# Altium PCB fat-ascii.PcbDoc
Units mm, origin at the board's own origin, x right, y up, seen from the top; angles counter-clockwise.
Board outline 48 x 48 mm, 2 copper layers (Top Layer, Bottom Layer); 16 components, 14 nets, 71 pads, 3 vias.
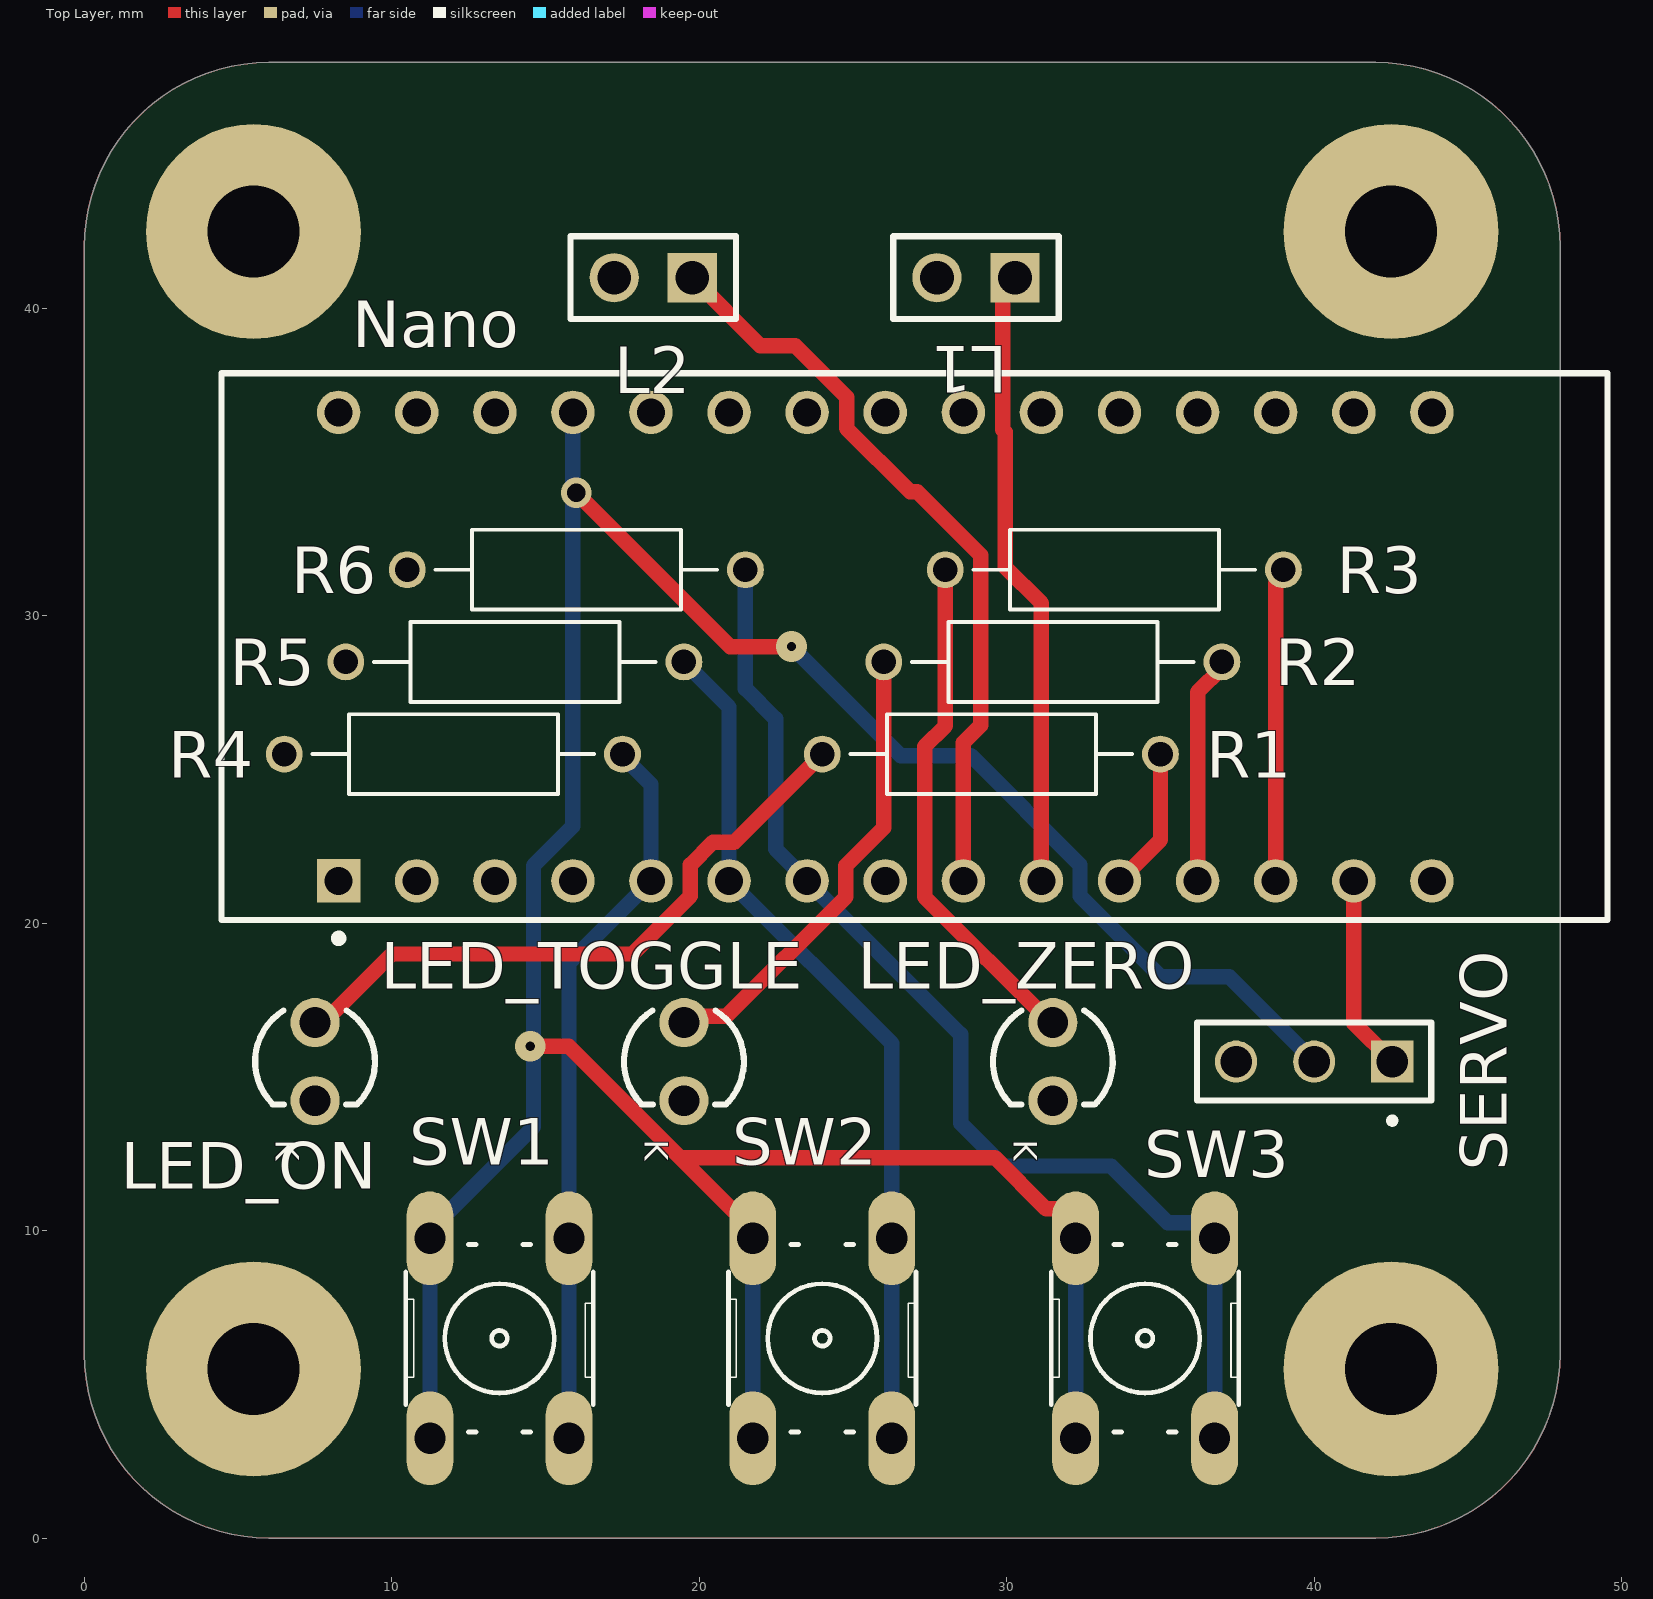
[diagram p0: Top Layer view]
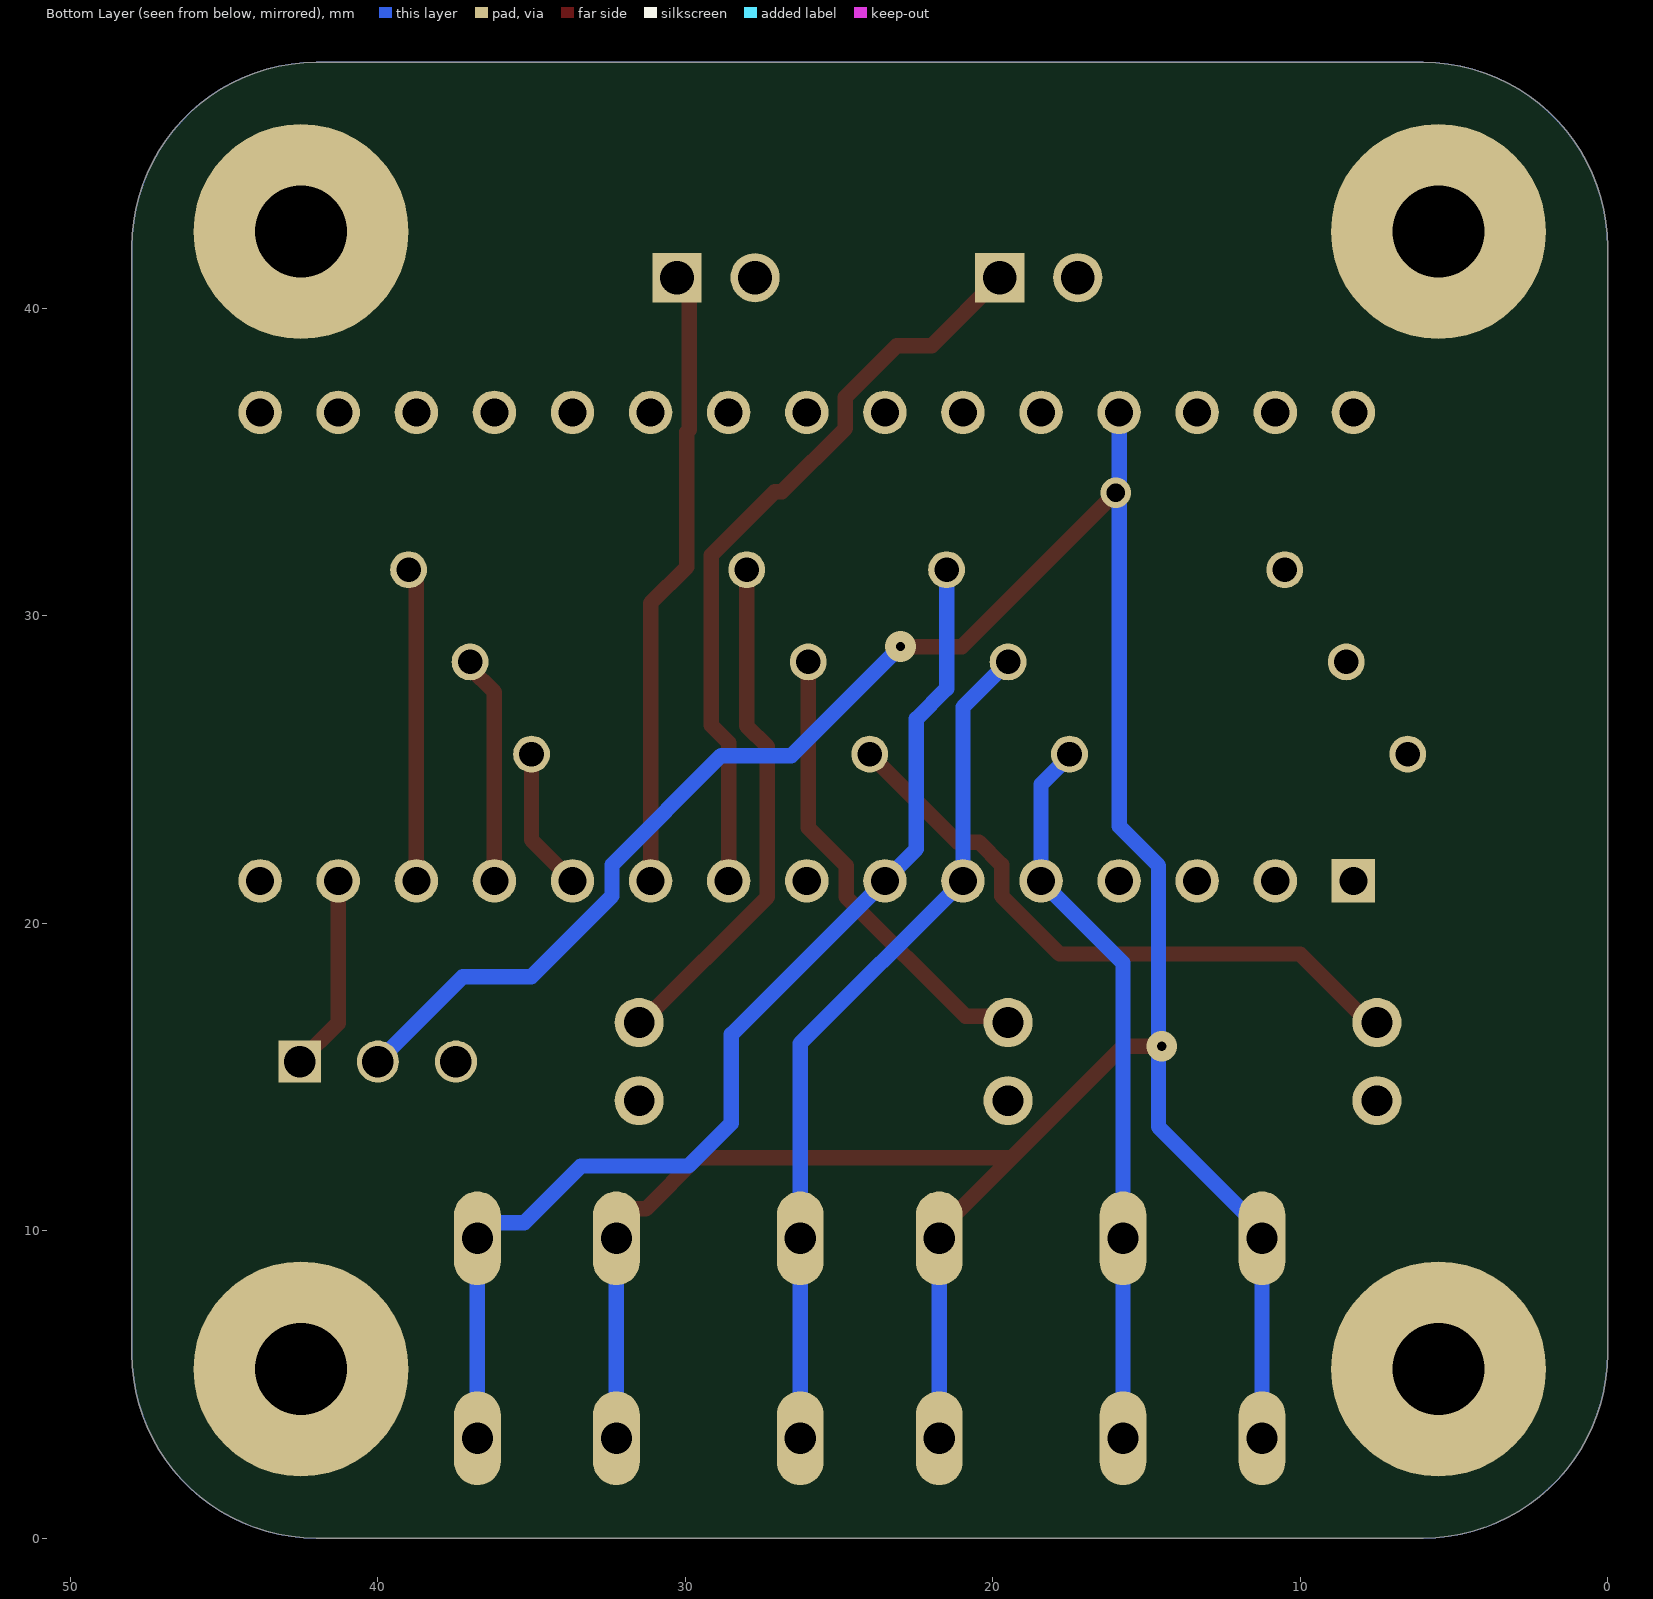
[diagram p1: Bottom Layer view, seen from below]

## Layer stack, top to bottom
Top Solder: solder mask 0.0102, Solder Resist, Dk 3.5
Top Layer: signal copper 0.0356
Dielectric 1: dielectric 0.32, FR-4, Dk 4.8
Bottom Layer: signal copper 0.0356
Bottom Solder: solder mask 0.0102, Solder Resist, Dk 3.5

## Board outline
0,6 0,42 cw(c6,42) 6,48 42,48 cw(c42,42) 48,42 48,6 cw(c42,6) 42,0 6,0 cw(c6,6)

## Design rules (kind name [scope] priority, off if disabled: settings)
AssemblyTestPointUsage [All] p0: scope1count=1 scope1_0_kind=Board scope1_0_value=Board scope2count=1 scope2_0_kind=Board scope2_0_value=Board commentlength=0
AssemblyTestpoint [All] p0: scope1count=1 scope1_0_kind=Board scope1_0_value=Board scope2count=1 scope2_0_kind=Board scope2_0_value=Board commentlength=0
BoardOutlineClearance [All] p0: scope1count=1 scope1_0_kind=Board scope1_0_value=Board scope2count=1 scope2_0_kind=Board scope2_0_value=Board commentlength=0 gap=1.5
BoardOutlineClearance [All] p1: gap=1.5 ignorepadtopadclearanceinfootprint=FALSE
Clearance [All] p0: scope1count=1 scope1_0_kind=Board scope1_0_value=Board scope2count=1 scope2_0_kind=Board scope2_0_value=Board commentlength=0 gap=0.3
Clearance [All] p1: gap=0.3 ignorepadtopadclearanceinfootprint=FALSE except(0.5: THPad-Via)
ComponentClearance [All] p0: scope1count=1 scope1_0_kind=Board scope1_0_value=Board scope2count=1 scope2_0_kind=Board scope2_0_value=Board commentlength=0 gap=0.254 collisioncheckmode=3
DiffPairsRouting [All] p0: scope1count=1 scope1_0_kind=Board scope1_0_value=Board scope2count=1 scope2_0_kind=Board scope2_0_value=Board commentlength=0
FabricationTestPointUsage [All] p0: scope1count=1 scope1_0_kind=Board scope1_0_value=Board scope2count=1 scope2_0_kind=Board scope2_0_value=Board commentlength=0 valid=0 allowmultiple=FALSE
FabricationTestpoint [All] p0: scope1count=1 scope1_0_kind=Board scope1_0_value=Board scope2count=1 scope2_0_kind=Board scope2_0_value=Board commentlength=0 side=3 testpointundercomponent=TRUE minsize=1.016 maxsize=2.54 preferedsize=1.524 minholesize=0 maxholesize=1.016 preferedholesize=0.813 testpointgrid=0.025
FanoutControl Fanout_BGA [All] p0 off: scope1count=1 scope1_0_kind=Board scope1_0_value=Board scope2count=1 scope2_0_kind=Board scope2_0_value=Board commentlength=69 // Protel DXP Scope 1 Expression Was: IsBGA   Fanout_BGA (Default Rule)
FanoutControl Fanout_LCC [All] p0 off: scope1count=1 scope1_0_kind=Board scope1_0_value=Board scope2count=1 scope2_0_kind=Board scope2_0_value=Board commentlength=69 // Protel DXP Scope 1 Expression Was: IsLCC   Fanout_LCC (Default Rule)
FanoutControl Fanout_SOIC [All] p0 off: scope1count=1 scope1_0_kind=Board scope1_0_value=Board scope2count=1 scope2_0_kind=Board scope2_0_value=Board commentlength=71 // Protel DXP Scope 1 Expression Was: IsSOIC   Fanout_SOIC (Default Rule)
FanoutControl Fanout_Small [All] p0 off: scope1count=1 scope1_0_kind=Board scope1_0_value=Board scope2count=1 scope2_0_kind=Board scope2_0_value=Board commentlength=84 // Protel DXP Scope 1 Expression Was: (CompPinCount < 5)   Fanout_Small (Default Rule)
FanoutControl Fanout_Default [All] p0: scope1count=1 scope1_0_kind=Board scope1_0_value=Board scope2count=1 scope2_0_kind=Board scope2_0_value=Board commentlength=30 // Fanout_Default (Default Rule)
Height [All] p0: scope1count=1 scope1_0_kind=Board scope1_0_value=Board scope2count=1 scope2_0_kind=Board scope2_0_value=Board commentlength=0
HoleSize [All] p0: scope1count=1 scope1_0_kind=Board scope1_0_value=Board scope2count=1 scope2_0_kind=Board scope2_0_value=Board commentlength=0 absolutevalues=TRUE maxlimit=3 minlimit=0.025 maxpercent=80.000 minpercent=20.000
HoleSize [All] p1: absolutevalues=TRUE maxlimit=3 minlimit=0.025 maxpercent=80.000 minpercent=20.000
HoleToHoleClearance [All] p0: scope1count=1 scope1_0_kind=Board scope1_0_value=Board scope2count=1 scope2_0_kind=Board scope2_0_value=Board commentlength=0
LayerPairs [All] p0: scope1count=1 scope1_0_kind=Board scope1_0_value=Board scope2count=1 scope2_0_kind=Board scope2_0_value=Board commentlength=0 enforce=TRUE
MinimumSolderMaskSliver [All] p0: scope1count=1 scope1_0_kind=Board scope1_0_value=Board scope2count=1 scope2_0_kind=Board scope2_0_value=Board commentlength=0
NetAntennae [All] p0: scope1count=1 scope1_0_kind=Board scope1_0_value=Board scope2count=1 scope2_0_kind=Board scope2_0_value=Board commentlength=0
PasteMaskExpansion [All] p0: scope1count=1 scope1_0_kind=Board scope1_0_value=Board scope2count=1 scope2_0_kind=Board scope2_0_value=Board commentlength=0 expansion=0
PlaneClearance [All] p0: scope1count=1 scope1_0_kind=Board scope1_0_value=Board scope2count=1 scope2_0_kind=Board scope2_0_value=Board commentlength=0 clearance=0.508
PlaneConnect [All] p0: scope1count=1 scope1_0_kind=Board scope1_0_value=Board scope2count=1 scope2_0_kind=Board scope2_0_value=Board commentlength=0 planeconnectstyle=Relief reliefexpansion=0.508 reliefentries=4 reliefconductorwidth=0.254 reliefairgap=0.254
PolygonConnect [All] p0: scope1count=1 scope1_0_kind=Board scope1_0_value=Board scope2count=1 scope2_0_kind=Board scope2_0_value=Board commentlength=0 connectstyle=Relief reliefconductorwidth=0.254 reliefentries=4 polygonreliefangle="90 Angle"
PolygonConnect [All] p1: connectstyle=Relief reliefconductorwidth=0.254 reliefentries=4 polygonreliefangle="90 Angle" airgapwidth=0.254
RoutingCorners [All] p0: scope1count=1 scope1_0_kind=Board scope1_0_value=Board scope2count=1 scope2_0_kind=Board scope2_0_value=Board commentlength=0 cornerstyle=45-Degree minsetback=2.54 maxsetback=2.54
RoutingLayers [All] p0: scope1count=1 scope1_0_kind=Board scope1_0_value=Board scope2count=1 scope2_0_kind=Board scope2_0_value=Board commentlength=0 top layer=Automatic bottom layer=Automatic
RoutingPriority [All] p0: scope1count=1 scope1_0_kind=Board scope1_0_value=Board scope2count=1 scope2_0_kind=Board scope2_0_value=Board commentlength=0
RoutingTopology [All] p0: scope1count=1 scope1_0_kind=Board scope1_0_value=Board scope2count=1 scope2_0_kind=Board scope2_0_value=Board commentlength=0 topology=Starburst
RoutingTopology [All] p1: topology=Starburst
RoutingVias [All] p0: scope1count=1 scope1_0_kind=Board scope1_0_value=Board scope2count=1 scope2_0_kind=Board scope2_0_value=Board commentlength=0 holewidth=0.711 width=1.27 viastyle="Through Hole" minholewidth=0.711 minwidth=1.27 maxholewidth=0.711 maxwidth=1.27
RoutingVias [All] p1: holewidth=0.711 width=1.27 viastyle="Through Hole" minholewidth=0.711 minwidth=1.27 maxholewidth=0.711 maxwidth=1.27
ShortCircuit [All] p0: scope1count=1 scope1_0_kind=Board scope1_0_value=Board scope2count=1 scope2_0_kind=Board scope2_0_value=Board commentlength=0 allowed=FALSE
SilkToBoardRegionClearance [All] p0: scope1count=1 scope1_0_kind=Board scope1_0_value=Board scope2count=1 scope2_0_kind=Board scope2_0_value=Board commentlength=0
SilkToSilkClearance [All] p0: scope1count=1 scope1_0_kind=Board scope1_0_value=Board scope2count=1 scope2_0_kind=Board scope2_0_value=Board commentlength=0
SilkToSilkClearance [All] p1: silktosilkclearance=0
SilkToSolderMaskClearance [All] p0 off: scope1count=1 scope1_0_kind=Board scope1_0_value=Board scope2count=1 scope2_0_kind=Board scope2_0_value=Board commentlength=44 // Protel DXP Scope 1 Expression Was: IsPad
SilkToSolderMaskClearance [IsPad] p1: minsilkscreentomaskgap=0 clearancetoexposedcopper=TRUE
SolderMaskExpansion [All] p0: scope1count=1 scope1_0_kind=Board scope1_0_value=Board scope2count=1 scope2_0_kind=Board scope2_0_value=Board commentlength=0 expansion=0.102
SolderMaskExpansion [All] p1: expansion=0.102 istentingtop=FALSE
UnRoutedNet [All] p0: scope1count=1 scope1_0_kind=Board scope1_0_value=Board scope2count=1 scope2_0_kind=Board scope2_0_value=Board commentlength=0
UnpouredPolygon [All] p0: scope1count=1 scope1_0_kind=Board scope1_0_value=Board scope2count=1 scope2_0_kind=Board scope2_0_value=Board commentlength=0
Width [All] p0: scope1count=1 scope1_0_kind=Board scope1_0_value=Board scope2count=1 scope2_0_kind=Board scope2_0_value=Board commentlength=0 maxlimit=0.5 minlimit=0.5 preferedwidth=0.5
Width [All] p1: maxlimit=0.5 minlimit=0.5 preferedwidth=0.5 minimp=50.000000 maximp=50.000000 favimp=50.000000
26 further rules are at their usual default settings.

## Classes and differential pairs
component class fat: L1 L2 LED_ON LED_TOGGLE LED_ZERO Nano R2 R3 R5 SERVO SW1 SW2 SW3

## Components (designator, comment, footprint, x,y, rotation, side; value= is the part's Value field where it differs from the comment)
L1 "61300211121" 61300211121 29,41 r180 top
L2 "61300211121" 61300211121 18.5,41 r180 top
LED_ON "151033BS03000" "Type 3mm" 7.5,15.5 r270 top
LED_TOGGLE "151033BS03000" "Type 3mm" 19.5,15.5 r270 top
LED_ZERO "151033BS03000" "Type 3mm" 31.5,15.5 r270 top
Nano "A000005" FP-A000005-MFG 27,29 r90 top
R1 "680" RESAD1100W55L680D260 29.5,25.5 r180 top
R2 "680" RESAD1100W55L680D260 31.5,28.5 r180 top
R3 "680" RESAD1100W55L680D260 33.5,31.5 r180 top
R4 "680" RESAD1100W55L680D260 12,25.5 r0 top
R5 "MFR-25FBF52-1K" RESAD1100W55L680D260 14,28.5 r180 top
R6 "680" RESAD1100W55L680D260 16,31.5 r0 top
SERVO "TSW-101-24-G-T" SAMTEC_TSW-101-24-G-T 42.54,15.5 r90 top
SW1 "SKHHANA010" SW_SKHHANA010 13.5,6.5 r90 top
SW2 "SKHHANA010" SW_SKHHANA010 24,6.5 r90 top
SW3 "SKHHANA010" SW_SKHHANA010 34.5,6.5 r90 top

## Footprints (in the part's own frame and the unit in brackets; to place one, negate y for a bottom-side part, rotate by r counter-clockwise, add the part's x,y. Pads: shape width x height; smd on the part's side, far side on the other; paste and mask are expansions set on the pad)
61300211121 [mm] "Pin Header, pitch 2.54 mm, THT, Vertical, single row, 2p"
  rect 1.6x1.6 hole 1.1: 1(-1.27,0)
  round 1.6 hole 1.1: 2(1.27,0)
  silkscreen extent -2.69,-1.35 2.69,1.35
FP-A000005-MFG [mil]
  rect 55.67x55.67 hole 35.98 paste-39370.1 mask+0: 1(-300,737.5)
  round 55.67 hole 35.98 paste-39370.1 mask+0: 2(-300,637.5) 3(-300,537.5) 4(-300,437.5) 5(-300,337.5) 6(-300,237.5) 7(-300,137.5) 8(-300,37.5) 9(-300,-62.5) 10(-300,-162.5) 11(-300,-262.5) 12(-300,-362.5) 13(-300,-462.5) 14(-300,-562.5) 15(-300,-662.5) 16(300,-662.5) 17(300,-562.5) 18(300,-462.5) 19(300,-362.5) 20(300,-262.5) 21(300,-162.5) 22(300,-62.5) 23(300,37.5) 24(300,137.5) 25(300,237.5) 26(300,337.5) 27(300,437.5) 28(300,537.5) 29(300,637.5) 30(300,737.5)
  silkscreen extent -379,-888 350,888
RESAD1100W55L680D260 [mm]
  round 1.2 hole 0.8: 1(-5.5,0) 2(5.5,0)
  silkscreen extent -4.58,-1.3 4.58,1.3
SAMTEC_TSW-101-24-G-T [mm]
  rect 1.37x1.37 / inner round 1.37 / far side rect 1.37x1.37 hole 1.02: 01(0,0)
  round 1.37 hole 1.02: 02(0,2.54) 03(0,5.08)
  silkscreen extent -2.02,-1.27 1.27,6.35
SW_SKHHANA010 [mil]
  oval 120x60 hole 40: 1(-128,89) 2(128,89) 3(-128,-89) 4(128,-89)
  silkscreen extent -120,-120 120,120
"Type 3mm" [mm] "THT, LED-3mm, 2pin- Body 4.15mm(max)"
  round 1.6 hole 1: 1(1.27,0) 2(-1.27,0)
  silkscreen extent -1.66,-1.95 1.4,1.95

## Part data
L1 L2: library part CMP-1712-00002-4, "THT Vertical Pin Header WR-PHD, Pitch 2.54 mm, Single Row, 2 pins"
LED_ON LED_TOGGLE LED_ZERO: library part CMP-1489-00002-1, "THT LED round mono-color waterclear, WL-TMRW , Blue"
Nano: library part CMP-189986-000002-1, "ARDUINO NANO ATMEGA328 EVAL BRD"
R1 R2 R3 R4 R6: library part MFR-25FBF52-1K, "1.07 kOhms ±1% 0.25W, 1/4W Through Hole Resistor Axial - Metal Film"
R5: "1.07 kOhms ±1% 0.25W, 1/4W Through Hole Resistor Axial - Metal Film"
SERVO: "Connector Header Through Hole 3 position -"
SW1 SW2 SW3: "Switch Tactile N.O. SPST Round Button PC Pins 0.05A 12VDC 0.98N Thru-Hole Bulk"

## Free pads (board coordinates)
  round 7 hole 3: 2(5.5,5.5) 3(42.5,5.5) 4(42.5,42.5) 5(5.5,42.5)

## Via types
v1: diameter 1, hole 0.3, Top Layer to Bottom Layer, 2 vias
v2: diameter 1, hole 0.6, Top Layer to Bottom Layer, 1 vias

## Nets (pads, with @x,y where several pads share a name; then routed paths per layer and width w, separated by ;. In a path a pad name is that pad's centre, name@x,y a point inside that pad or via, vN(x,y) a via of type N, cw(c..) or ccw(c..) an arc to the next point about the centre after c; other vN are vias at no path point)
5V: Nano.27 SERVO.02 SW1.1 SW1.2 SW2.1 SW2.2 SW3.1 SW3.2 | length 105.8
  Top Layer w0.5: v1(14.5,16) 15.753,16 19.376,12.376 ; v2(16,34) 21,29 v1(23,29) ; SW2.2@21.739,9.251 SW2.2 21.739,10.013 19.376,12.376 ; SW3.2 32.239,10.236 31.766,10.709 31.281,10.709 29.614,12.376 19.376,12.376
  Bottom Layer w0.5: SW1.1@11.239,2.749 SW1.1 SW1.2 11.239,10.013 14.604,13.378 14.604,21.875 15.887,23.158 Nano.27 ; SW2.1@21.739,2.749 SW2.1 SW2.2@21.739,9.251 ; v1(23,29) 26.55,25.45 28.835,25.45 32.384,21.901 32.384,20.885 35.007,18.263 37.237,18.263 SERVO.02 ; SW3.1 SW3.2
BUTTON_LASER_TOGG: Nano.7 R6.2 SW3.3 SW3.4 | length 37.2
  Bottom Layer w0.5: R6.2 21.5,27.631 22.483,26.648 22.483,22.416 23.507,21.392 Nano.7 28.5,16.388 28.5,13.5 29.895,12.105 33.395,12.105 35.237,10.263 36.288,10.263 36.761,9.79 SW3.4 SW3.3
BUTTON_POS_TOGG: Nano.6 R5.1 SW2.3 SW2.4 | length 28.6
  Bottom Layer w0.5: R5.1 20.967,27.032 Nano.6 26.261,16.087 SW2.4 SW2.3 SW2.3@26.261,2.749
BUTTON_SWEEP_ZERO: Nano.5 R4.2 SW1.3 SW1.4 | length 24.2
  Bottom Layer w0.5: SW1.3@15.761,2.749 SW1.3 SW1.4 15.761,18.713 Nano.5 18.427,24.518 17.5,25.446 R4.2
GND: L1.2 L2.2 LED_ON.1 LED_TOGGLE.1 LED_ZERO.1 Nano.4 Nano.29 pad.2 pad.3 pad.4 pad.5 R4.1 R5.2 R6.1 SERVO.03
LASER_AWAY: L1.1 Nano.10 | length 20.3
  Top Layer w0.5: L1.1 29.87,40.6 29.87,36.059 29.95,35.979 29.95,31.588 31.127,30.41 Nano.10
LASER_SWEEP_ZERO: L2.1 Nano.9 | length 24.5
  Top Layer w0.5: L2.1 21.988,38.782 23.123,38.782 24.79,37.115 24.79,36.099 26.852,34.038 27.089,34.038 29.15,31.976 29.15,26.438 28.587,25.876 Nano.9
NetLED_ON_2: LED_ON.2 R1.2 | length 20.7
  Top Layer w0.5: LED_ON.2 7.77,16.77 10,19 17.825,19 19.71,20.885 19.71,21.901 20.447,22.637 21.137,22.637 R1.2
NetLED_TOGGLE_2: LED_TOGGLE.2 R2.2 | length 15.1
  Top Layer w0.5: LED_TOGGLE.2 19.71,16.98 20.886,16.98 24.764,20.859 24.764,21.875 26,23.11 R2.2
NetLED_ZERO_2: LED_ZERO.2 R3.2 | length 16.8
  Top Layer w0.5: R3.2 28,26.42 27.33,25.75 27.33,20.859 31.42,16.77 LED_ZERO.2
NetNano_11: Nano.11 R1.1 | length 4.7
  Top Layer w0.5: Nano.11 35,22.712 R1.1
NetNano_12: Nano.12 R2.1 | length 7.4
  Top Layer w0.5: Nano.12 36.207,27.518 37,28.311 R2.1
NetNano_13: Nano.13 R3.1 | length 10.2
  Top Layer w0.5: Nano.13 38.747,31.058 39,31.311 R3.1
SERVO_PWM: Nano.14 SERVO.01 | length 6.4
  Top Layer w0.5: Nano.14 41.287,16.752 SERVO.01
pads on no net: Nano.1 Nano.2 Nano.3 Nano.8 Nano.15 Nano.16 Nano.17 Nano.18 Nano.19 Nano.20 Nano.21 Nano.22 Nano.23 Nano.24 Nano.25 Nano.26 Nano.28 Nano.30

## Polygon pours and split planes (outlines as drawn)
GND on Bottom Layer "GND_L02_P000" (solid, pour order 0): 0,6 0,42 cw(c6,42) 6,48 42,48 cw(c42,42) 48,42 48,6 cw(c42,6) 42,0 6,0 cw(c6,6)
GND on Top Layer "GND_L01_P001" (solid, pour order 1): 0,6 0,42 cw(c6,42) 6,48 42,48 cw(c42,42) 48,42 48,6 cw(c42,6) 42,0 6,0 cw(c6,6)

## Silkscreen, mask and mechanical layers (free items; w line width, h text height)
Mechanical 15:
  the board outline again, w0.254

## Text inside footprints (layer, text, board x,y; h text height)
LED_ON: Mechanical 15 "K" at 6.23,12.96 h0.76 r270; Top Overlay "K" at 6.23,12.96 h0.76 r270
LED_TOGGLE: Mechanical 15 "K" at 18.23,12.96 h0.76 r270; Top Overlay "K" at 18.23,12.96 h0.76 r270
LED_ZERO: Mechanical 15 "K" at 30.23,12.96 h0.76 r270; Top Overlay "K" at 30.23,12.96 h0.76 r270
SW1: Mechanical 13 "1" at 11.848,2.179 h1.27 r90; Mechanical 13 "2" at 11.974,10.061 h1.27 r90; Mechanical 13 "3" at 16.296,1.924 h1.27 r90; Mechanical 13 "4" at 16.297,10.059 h1.27 r90
SW2: Mechanical 13 "1" at 22.348,2.179 h1.27 r90; Mechanical 13 "2" at 22.474,10.061 h1.27 r90; Mechanical 13 "3" at 26.796,1.924 h1.27 r90; Mechanical 13 "4" at 26.797,10.059 h1.27 r90
SW3: Mechanical 13 "1" at 32.848,2.179 h1.27 r90; Mechanical 13 "2" at 32.974,10.061 h1.27 r90; Mechanical 13 "3" at 37.296,1.924 h1.27 r90; Mechanical 13 "4" at 37.297,10.059 h1.27 r90